# Allegro board asdfasdf.brd
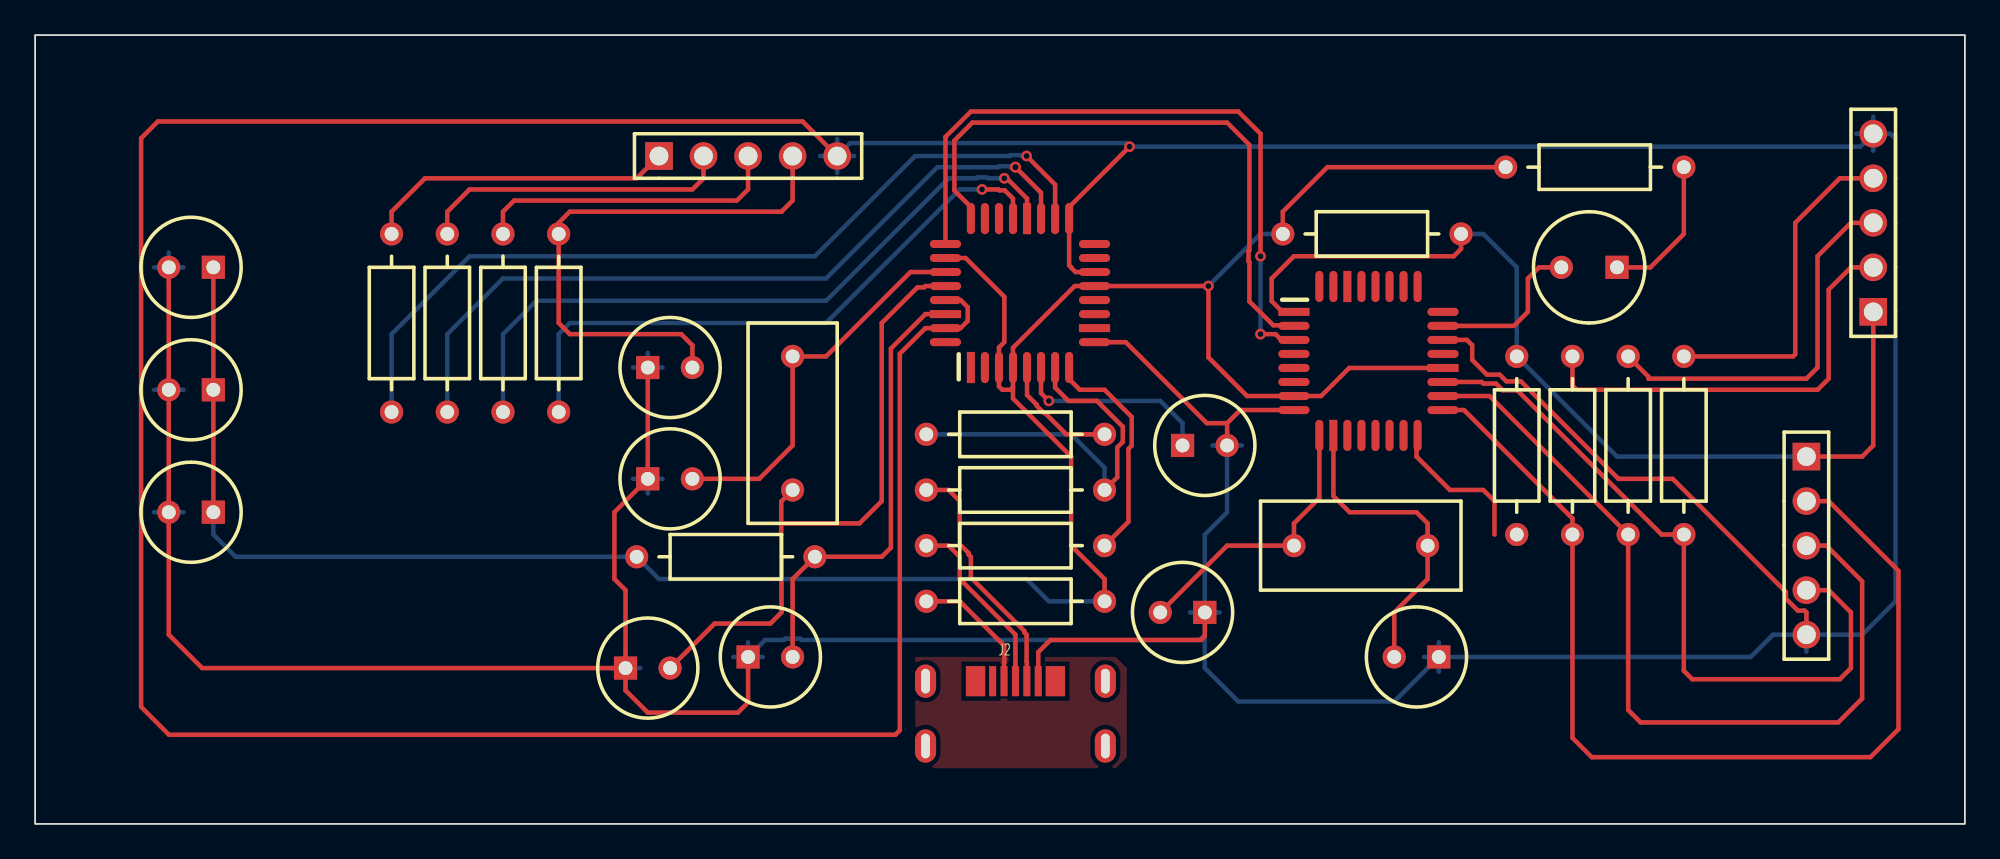
[diagram p0: board, top side]
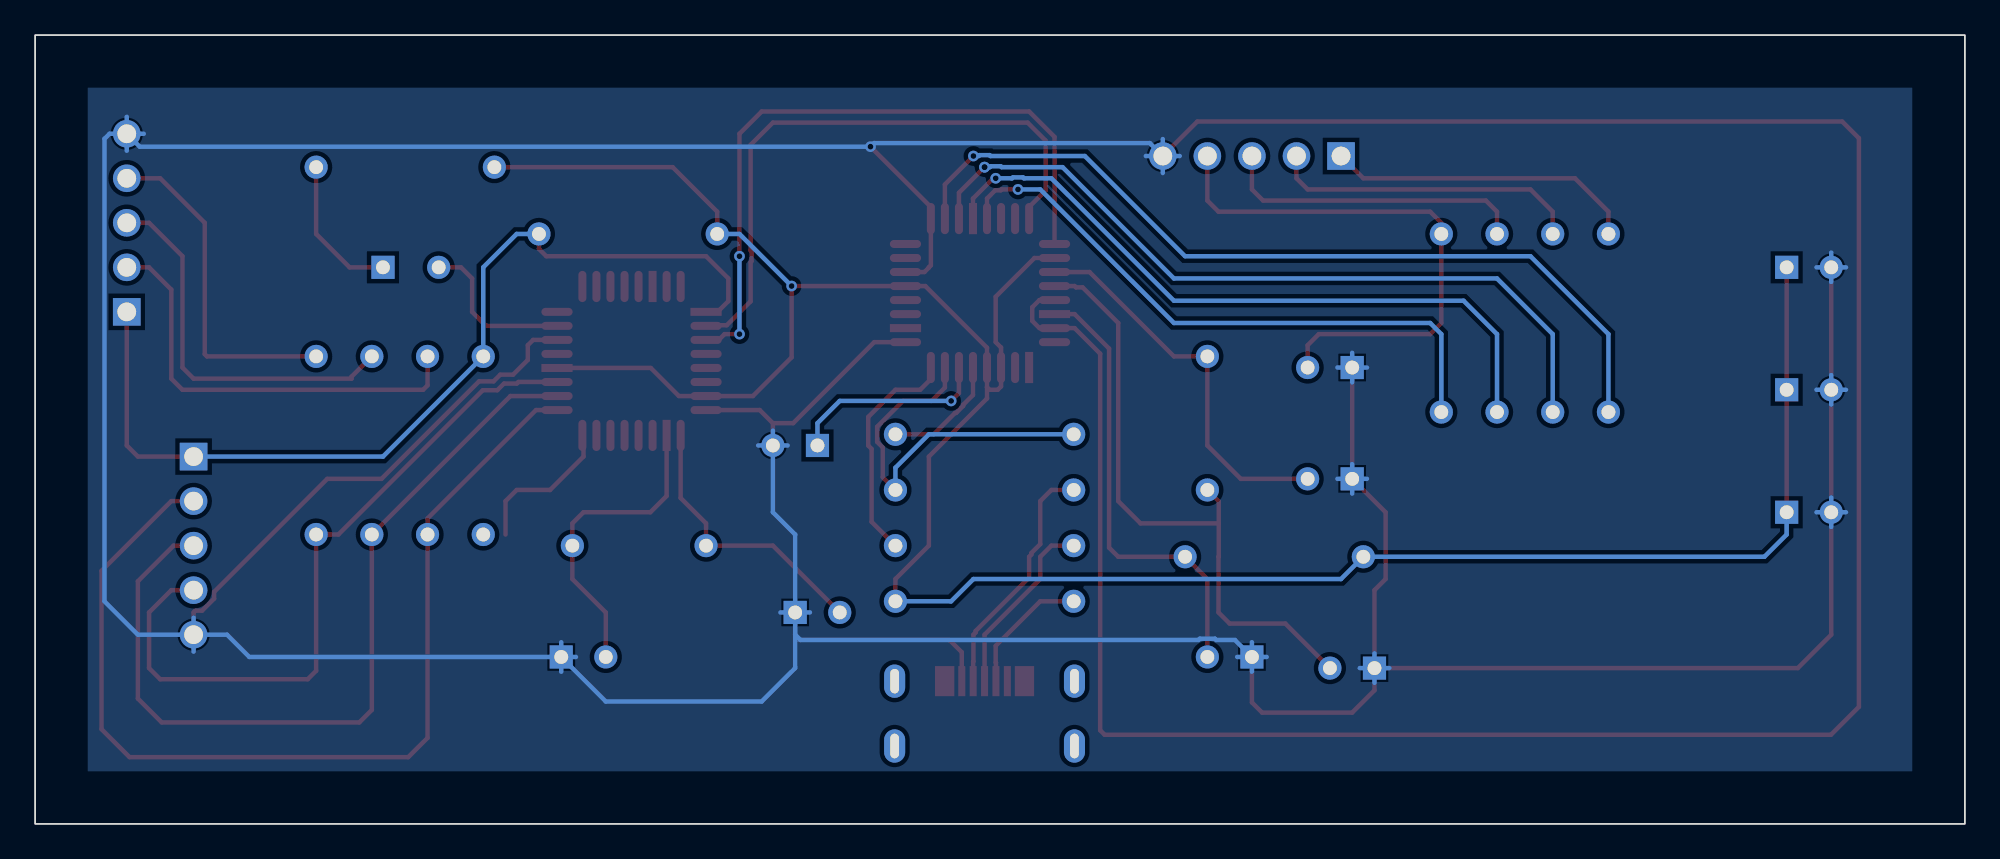
[diagram p1: board, bottom side, seen from below]

Outline 110 x 45 mm; copper layers: TOP, BOTTOM. Coordinates in mm from the lower left corner of the outline.
Outline path: rectangle 0,0 110,45

## Placement (name value [footprint] x y rotation side)
C1  47nF  [CPCYL1D225LS100031]  40.64 9.53 0 top
C2  27pF  [CPCYL1D225LS100031]  33.66 8.89 0 top
C3  27pF  [CPCYL1D225LS100031]  34.92 19.68 0 top
C4  47nF  [CPCYL1D225LS100031]  65.41 21.59 0 top
C5  100nF  [CPCYL1D225LS100031]  10.16 31.75 180 top
C6  1uF  [CPCYL1D225LS100031]  10.16 17.78 180 top
C7  100nF  [CPCYL1D225LS100031]  66.67 12.06 180 top
C8  100nF  [CPCYL1D225LS100031]  80.01 9.53 180 top
C9  100nF  [CPCYL1D225LS100031]  10.16 24.77 180 top
C10  22nF  [CPCYL1D225LS100031]  34.92 26.04 0 top
D1  LED  [CYLD250LS125031]  90.17 31.75 180 top
IC1  ATmega8  [QUAD80M32WG900]  71.75 29.21 270 top
J1  bbpg_Bitbang  [BLKCON100VHTM1SQSW1005]  35.56 38.1 0 top
J2  USBA  [MICRO_USB]  55.88 4.45 0 top
J3  avrusb500_out  [BLKCON100VHTM1SQSW1005]  104.78 29.21 90 top
J4  firmware_in  [BLKCON100VHTM1SQSW1005]  100.97 20.95 270 top
R1  470  [AX400X100031]  44.45 15.24 180 top
R2  220  [AX400X100031]  29.84 23.5 90 top
R3  220  [AX400X100031]  26.67 23.5 90 top
R4  220  [AX400X100031]  23.5 23.5 90 top
R5  27  [AX400X100031]  50.8 15.88 0 top
R6  27  [AX400X100031]  50.8 19.05 0 top
R7  1.5k  [AX400X100031]  50.8 22.23 0 top
R8  2.2  [AX400X100031]  50.8 12.7 0 top
R9  10k  [AX400X100031]  71.12 33.66 0 top
R10  470  [AX400X100031]  93.98 37.47 180 top
R11  1k  [AX400X100031]  93.98 16.51 90 top
R12  220  [AX400X100031]  90.81 16.51 90 top
R13  1k  [AX400X100031]  87.63 16.51 90 top
R14  220  [AX400X100031]  20.32 23.5 90 top
R15  220  [AX400X100031]  84.45 16.51 90 top
U1  FT232BM  [QUAD80M32WG900]  53.34 26.04 0 top
Y1  3.6864Mhz  [RAD450X200LS300031]  79.38 15.88 180 top
Y2  6Mhz  [RAD450X200LS300031]  43.18 19.05 90 top

## Library data of the parts
C1-C5 C7-C10 = CAPACITOR NON-POL: alternate symbols: (SMDCAP)
C6 = CAPACITOR POL: alternate symbols: (SMDCAP)
D1 = LED
IC1 = ATmega8-DIL28_2
J1 J3 J4 = CON5
J2 = CON4_7
R1-R15 = R: alternate symbols: (SMDRES)
U1 = FT232BM_4
Y1 Y2 = ZTA

## Footprints (pads in the part's own frame, mm; a bottom-side part is the same pattern mirrored in y, then rotated)
AX400X100031
  round 1.321 hole 0.787: 1(0,0) 2(10.16,0)
BLKCON100VHTM1SQSW1005
  rect 1.575x1.575 hole 1.067: 1(0,0)
  round 1.575 hole 1.067: 2(2.54,0) 3(5.08,0) 4(7.62,0) 5(10.16,0)
CPCYL1D225LS100031
  rect 1.321x1.321 hole 0.787: 1(0,0)
  round 1.321 hole 0.787: 2(2.54,0)
CYLD250LS125031
  rect 1.321x1.321 hole 0.787: 1(0,0)
  round 1.321 hole 0.787: 2(3.175,0)
MICRO_USB
  oval 1.2x1.9 hole 0.5x1.4: (-5.125,3.7) (-5.125,0) (5.125,3.7) (5.125,0)
  rect 1.1x1.72 smd: (-2.275,3.7) (2.275,3.7)
  rect 0.4x1.72 smd: 1(1.3,3.7) 2(0.65,3.7) 3(0,3.7) 4(-0.65,3.7) 5(-1.3,3.7)
QUAD80M32WG900
  rect 0.457x1.778 smd: 1(0,0) 20(3.2,8.496)
  oval 0.457x1.778 smd: 2(0.8,0) 3(1.6,0) 4(2.4,0) 5(3.2,0) 6(4,0) 7(4.801,0) 8(5.601,0) 17(5.601,8.496) 18(4.801,8.496) 19(4,8.496) 21(2.4,8.496) 22(1.6,8.496) 23(0.8,8.496) 24(0,8.496)
  oval 1.778x0.457 smd: 9(7.048,1.448) 11(7.048,3.048) 12(7.048,3.848) 13(7.048,4.648) 14(7.048,5.448) 15(7.048,6.248) 16(7.048,7.048) 25(-1.448,7.048) 26(-1.448,6.248) 27(-1.448,5.448) 28(-1.448,4.648) 29(-1.448,3.848) 31(-1.448,2.248) 32(-1.448,1.448)
  rect 1.778x0.457 smd: 10(7.048,2.248) 30(-1.448,3.048)
RAD450X200LS300031
  round 1.321 hole 0.787: 1(0,0) 2(7.62,0)

## Nets
+5V: J2.4 R8.1
GND: C1.1 C2.1 C3.1 C4.2 C5.2 C6.2 C7.1 C8.1 C9.2 C10.1 IC1.8(GND) IC1.22(AGND) J1.5 J2.1 J3.5 J4.5 U1.9(GND) U1.14(PWRCTL) U1.17(GND1) U1.29(AGND) U1.31(TEST)
VCC: C5.1 C6.1 C9.1 IC1.7(VCC) IC1.20(AVCC) R1.2 R8.2 R9.1 R10.2 U1.3(VCC) U1.4(RESET#) U1.13(VCC-IO) U1.26(VCC1)
BMISO: J1.3 R3.2
BMOSI: J1.2 R4.2
BRESET: J1.1 R14.2
BSCK: C10.2 J1.4 R2.2
D+: J2.2 R6.1
D-: J2.3 R5.1
F_MISO: IC1.18((MISO) PB4) J4.3 R12.1
F_MOSI: IC1.17((OC2/MOSI) PB3) J4.2 R13.1
F_SCK: IC1.19((SCK) PB5) J4.4 R11.1
MISO: J3.3 R12.2
MOSI: J3.2 R13.2
RESET: IC1.1(PC6 (R\E\S\E\T\)) J3.1 J4.1 R9.2 R15.2
RXD: IC1.2(PD0 (RXD)) U1.24(RXD)
SCK: J3.4 R11.2
TXD: IC1.3(PD1 (TXD)) U1.25(TXD)
N02483: R6.2 R7.1 U1.7(USBDP)
N02615: R5.2 U1.8(USBDM)
N03527: C4.1 U1.6(3V3OUT)
N06839: R2.1 U1.21(DTR#)
N06967: R3.1 U1.20(DSR#)
N07033: R4.1 U1.19(DCD#)
N07247: R14.1 U1.18(RI#)
N11951: R7.2 U1.5(RSTOUT#)
N15182: C7.2 IC1.9(PB6 (XT1/TOSC1)) Y1.2
N15289: C8.2 IC1.10(PB7 (XT2/TOSC2)) Y1.1
N19734: D1.2(CATHODE) IC1.23((ADC0) PC0)
N20572: D1.1(ANODE) R10.1
N22544: IC1.16((SS/OC1B) PB2) R15.1
N41098: C3.2 U1.27(XTIN) Y2.2
N41106: C2.2 U1.28(XTOUT) Y2.1
N49165: C1.2 R1.1 U1.30(AVCC)

Pads without a net: IC1 4 5 6 11 12 13 14 15 21 24 25 26 27 28 29 30 31 32; J2 5; U1 1 2 10 11 12 15 16 22 23 32

## Via types
v1: diameter 0.61, hole 0.33, TOP to BOTTOM, 10 vias

## Routing (per net, layer and track width the routed paths; a pad name or vN(x,y) marks a point on that pad's centre or on a via; arc(x,y) is an arc through that point)
+5V: length 7.5
  TOP w0.254: J2.4 55.23,9.2 55.24,9.21 55.24,10.16 52.7,12.7 R8.1
GND: length 498.8
  TOP w0.254: 67.94,22.86 68.69,23.61 IC1.8 ; 67.94,22.86 67.94,21.59 ; 67.94,22.86 66.79,22.86 62.17,27.48 U1.9 ; C7.1 66.67,10.71 66.46,10.49 57.88,10.49 57.18,9.8 J2.1 ; U1.29 52.75,29.88 53.16,29.47 53.16,28.7 52.75,28.28 U1.31 50.75,28.28 49.29,26.82 49.29,5.34 49.04,5.09 7.63,5.09 6.04,6.68 6.04,39.11 7,40.07 43.75,40.07 J1.5 ; C2.1 33.66,13.34 33.02,13.97 33.02,17.78 C3.1 C10.1 ; C2.1 9.53,8.89 7.62,10.79 C6.2 C9.2 C5.2 ; C2.1 33.66,7.62 34.92,6.35 40.06,6.35 40.64,6.93 C1.1 ; U1.14 59.31,31.48 59.05,31.74 59.05,31.75 58.94,31.86 U1.17 58.94,35.19 v1(62.38,38.63) ; 80.25,27.61 81.61,27.61 81.92,27.31 81.92,26.47 82.75,25.63 83.48,25.63 83.86,25.25 84.69,25.25 90.25,19.68 93.34,19.68 99.8,13.23 99.8,12.85 100.48,12.17 100.86,12.17 100.97,12.06 100.97,10.79
  BOTTOM w0.254: C3.1 34.92,20.53 ; C3.1 34.08,19.68 ; C3.1 34.92,18.84 ; C3.1 35.77,19.68 ; 66.67,10.79 66.37,10.49 43.68,10.49 43.61,10.57 42.75,10.57 42.68,10.49 41.61,10.49 C1.1 ; 66.67,10.79 C7.1 ; 66.67,10.79 66.67,8.89 68.58,6.99 77.47,6.99 C8.1 ; 6.78,31.75 C5.2 ; C5.2 8.46,31.75 ; C5.2 7.62,32.59 ; C5.2 7.62,30.91 ; C9.2 8.46,24.77 ; C9.2 7.62,23.92 ; C9.2 6.78,24.77 ; C9.2 7.62,25.61 ; 34.92,25.19 C10.1 ; C10.1 34.92,26.88 ; C10.1 35.77,26.04 ; C10.1 34.08,26.04 ; 100.97,10.79 99.06,10.79 97.79,9.53 C8.1 ; 100.97,10.79 100.97,11.76 ; 100.97,10.79 100.97,9.83 ; 100.97,10.79 104.14,10.79 106.05,12.7 106.05,39.08 105.75,39.37 J3.5 ; 32.81,8.89 C2.1 ; C2.1 34.5,8.89 ; C2.1 33.66,9.73 ; C2.1 33.66,8.05 ; C7.1 65.83,12.06 ; C7.1 67.52,12.06 ; C7.1 66.67,16.51 67.94,17.78 67.94,21.59 ; 40.64,8.68 C1.1 ; C1.1 39.8,9.53 ; C1.1 40.64,10.37 ; C1.1 41.48,9.53 ; J1.5 46.46,38.84 62.18,38.84 v1(62.38,38.63) 104.04,38.63 J3.5 ; J1.5 45.72,37.13 ; J1.5 45.72,39.07 ; J1.5 44.75,38.1 ; J1.5 46.69,38.1 ; C6.2 8.46,17.78 ; C6.2 6.78,17.78 ; C6.2 7.62,18.62 ; C6.2 7.62,16.94 ; 67.1,21.59 67.94,21.59 ; 67.94,21.59 68.79,21.59 ; 67.94,21.59 67.94,22.43 ; 104.78,38.4 J3.5 ; J3.5 103.81,39.37 ; J3.5 104.78,40.34 ; C8.1 79.17,9.53 ; C8.1 80.01,8.68 ; C8.1 80.01,10.37
VCC: length 146.8
  TOP w0.254: C6.1 C9.1 C5.1 ; 55.74,24.91 55.6,24.77 55.13,24.77 54.94,24.95 U1.3 54.94,27.18 55.24,27.48 55.24,30.07 53.03,32.28 U1.26 ; 55.74,24.91 55.74,24.27 59.05,20.95 59.05,15.88 60.96,13.97 R8.2 ; 55.74,24.91 U1.4 55.74,27.16 59.26,30.68 U1.13 v1(66.88,30.68) 66.88,26.61 69.08,24.41 IC1.7 73.3,24.41 74.91,26.01 80.25,26.01 ; R10.2 73.66,37.47 71.12,34.92 R9.1
  BOTTOM w0.254: R9.1 69.85,33.66 v1(66.88,30.68) ; R8.2 57.78,12.7 56.51,13.97 35.56,13.97 R1.2 11.43,15.24 10.16,16.51 C6.1
BMISO: length 17.7
  TOP w0.254: R3.2 26.67,34.92 27.3,35.56 40.01,35.56 40.64,36.2 J1.3
BMOSI: length 17.9
  TOP w0.254: J1.2 38.1,36.83 37.47,36.2 24.77,36.2 23.5,34.92 R4.2
BRESET: length 17.8
  TOP w0.254: R14.2 20.32,34.92 22.23,36.83 34.29,36.83 J1.1
BSCK: length 31.5
  TOP w0.254: C10.2 37.47,27.3 36.83,27.94 30.48,27.94 29.84,28.57 R2.2 29.84,34.29 30.48,34.92 42.55,34.92 43.18,35.56 J1.4
D+: length 14
  TOP w0.254: R6.1 52.07,19.05 52.7,18.41 52.7,15.96 53.21,15.45 53.21,15.37 53.34,15.24 53.34,14.05 56.39,11.01 56.39,10.92 56.52,10.8 56.52,9.27 56.53,9.26 J2.2
D-: length 10.6
  TOP w0.254: R5.1 52.07,15.88 52.7,15.24 52.7,13.97 55.88,10.8 J2.3
F_MISO: length 48.7
  TOP w0.254: 80.25,24.41 82.91,24.41 R12.1 90.81,6.5 91.52,5.79 102.78,5.79 104.14,7.15 104.14,13.84 102.11,15.88 100.97,15.88
F_MOSI: length 58.1
  TOP w0.254: 80.25,23.61 81.45,23.61 87.63,17.43 R13.1 87.63,4.91 88.73,3.81 104.62,3.81 106.21,5.41 106.21,14.44 102.23,18.41 J4.2
F_SCK: length 41.3
  TOP w0.254: 100.97,13.34 102.23,13.34 103.5,12.06 103.5,8.89 102.87,8.26 94.46,8.26 93.98,8.73 R11.1 92.71,16.51 84.48,24.74 83.65,24.74 83.27,25.12 82.54,25.12 82.45,25.21 80.25,25.21
MISO: length 22
  TOP w0.254: J3.3 103.5,34.29 101.6,32.38 101.6,26.04 100.97,25.4 91.96,25.4 91.96,25.51 R12.2
MOSI: length 24.8
  TOP w0.254: R13.2 87.63,25.02 87.88,24.77 101.6,24.77 102.23,25.4 102.23,30.48 103.5,31.75 J3.2
RESET: length 54.8
  TOP w0.254: R9.2 81.28,32.8 80.86,32.38 71.75,32.38 70.48,31.11 70.48,29.82 71.09,29.21 IC1.1 ; J4.1 104.14,20.95 104.78,21.59 J3.1
  BOTTOM w0.254: R9.2 82.55,33.66 84.45,31.75 R15.2 90.17,20.95 J4.1
RXD: length 34.7
  TOP w0.254: U1.24 53.34,35.19 52.4,36.13 52.4,38.98 53.42,40.01 67.94,40.01 69.22,38.73 69.22,32.72 69.16,32.67 69.16,32.1 69.22,32.05 69.22,29.81 70.57,28.45 71.72,28.45 IC1.2
SCK: length 19.4
  TOP w0.254: J3.4 102.87,36.83 100.33,34.29 100.33,26.8 100.2,26.67 R11.2
TXD: length 38.7
  TOP w0.254: v1(69.85,32.38) 69.85,39.37 68.58,40.64 53.34,40.64 51.89,39.19 U1.25 ; IC1.3 71.03,27.61 70.7,27.94 v1(69.85,27.94)
  BOTTOM w0.254: v1(69.85,32.38) v1(69.85,27.94)
N02483: length 22.2
  TOP w0.254: 58.14,26.04 58.14,24.89 58.9,24.13 60.53,24.13 62,22.66 62,21.79 61.68,21.48 61.68,19.77 R6.2
  BOTTOM w0.254: R6.2 60.96,20.32 59.05,22.23 R7.1
N02615: length 13.1
  TOP w0.254: R5.2 62.32,17.23 62.32,21.39 62.51,21.58 62.51,23.21 60.96,24.77 59.55,24.77 58.94,25.38 U1.8
N03527: length 11.5
  TOP w0.254: U1.6 57.34,24.57 v1(57.78,24.13)
  BOTTOM w0.254: v1(57.78,24.13) 64.14,24.13 65.41,22.86 C4.1
N06839: length 35.1
  TOP w0.254: U1.21 55.74,35.67 55.27,36.14 54.96,36.14 54.91,36.2 v1(53.98,36.2)
  BOTTOM w0.254: v1(53.98,36.2) 52.7,36.2 45.09,28.57 30.48,28.57 29.84,27.94 R2.1
N06967: length 39.7
  TOP w0.254: v1(55.24,36.83) 55.38,36.83 56.54,35.67 U1.20
  BOTTOM w0.254: R3.1 26.67,27.94 28.57,29.84 45.09,29.84 52.07,36.83 53.64,36.83 53.69,36.88 54.26,36.88 54.31,36.83 v1(55.24,36.83)
N07033: length 44.4
  TOP w0.254: U1.19 57.34,36.01 v1(55.88,37.47)
  BOTTOM w0.254: R4.1 23.5,27.94 26.67,31.11 45.09,31.11 51.44,37.47 54.91,37.47 54.96,37.52 55.53,37.52 55.58,37.47 v1(55.88,37.47)
N07247: length 49.1
  TOP w0.254: 58.14,34.53 58.14,36.47 v1(56.52,38.1)
  BOTTOM w0.254: R14.1 20.32,27.94 24.77,32.38 44.45,32.38 50.16,38.1 55.54,38.1 55.59,38.15 56.16,38.15 56.22,38.1 v1(56.52,38.1)
N11951: length 7
  TOP w0.254: U1.5 56.54,24.46 57.1,23.91 57.1,23.84 57.5,23.44 57.56,23.44 58.78,22.23 R7.2
N15182: length 16.1
  TOP w0.254: 64.14,12.06 67.94,15.88 Y1.2 71.75,17.14 73.2,18.59 73.2,22.16
N15289: length 17.9
  TOP w0.254: IC1.10 74,18.71 74.93,17.78 78.74,17.78 79.38,17.14 Y1.1 79.38,13.97 77.47,12.06 C8.2
N19734: length 9.2
  TOP w0.254: D1.2 85.72,31.75 85.09,31.11 85.09,29.21 84.29,28.41 80.25,28.41
N20572: length 8.4
  TOP w0.254: R10.1 93.98,33.66 92.08,31.75 D1.1
N22544: length 8.6
  TOP w0.254: 83.19,16.51 83.19,18.41 82.55,19.05 80.64,19.05 78.74,20.95 78.74,22.1 IC1.16
N41098: length 22.3
  TOP w0.254: U1.27 49.9,31.48 45.09,26.67 Y2.2 43.18,21.59 41.27,19.68 C3.2
N41106: length 35.8
  TOP w0.254: U1.28 50.75,30.68 50.67,30.61 50.29,30.61 48.26,28.57 48.26,18.41 46.99,17.14 42.53,17.14 ; Y2.1 42.53,18.4 42.53,17.14 ; 42.53,17.14 42.53,15.25 42.55,15.24 42.55,12.06 41.91,11.43 38.73,11.43 C2.2
N49165: length 26.1
  TOP w0.254: U1.30 50.75,29.08 48.78,27.12 48.78,15.76 48.26,15.24 R1.1 43.18,13.97 C1.2

## Copper pours and planes (outline as drawn; the poured copper is in the pictures)
+5V on TOP: 50.16,3.17 50.16,9.53 61.59,9.53 62.23,8.89 62.23,3.81 61.59,3.17
GND on BOTTOM: 3,3 3,42 107,42 107,3
